# EAGLE board PeakEtherGateway-nosd-v0.1 (EAGLE 6.6.0), part 1 of 2
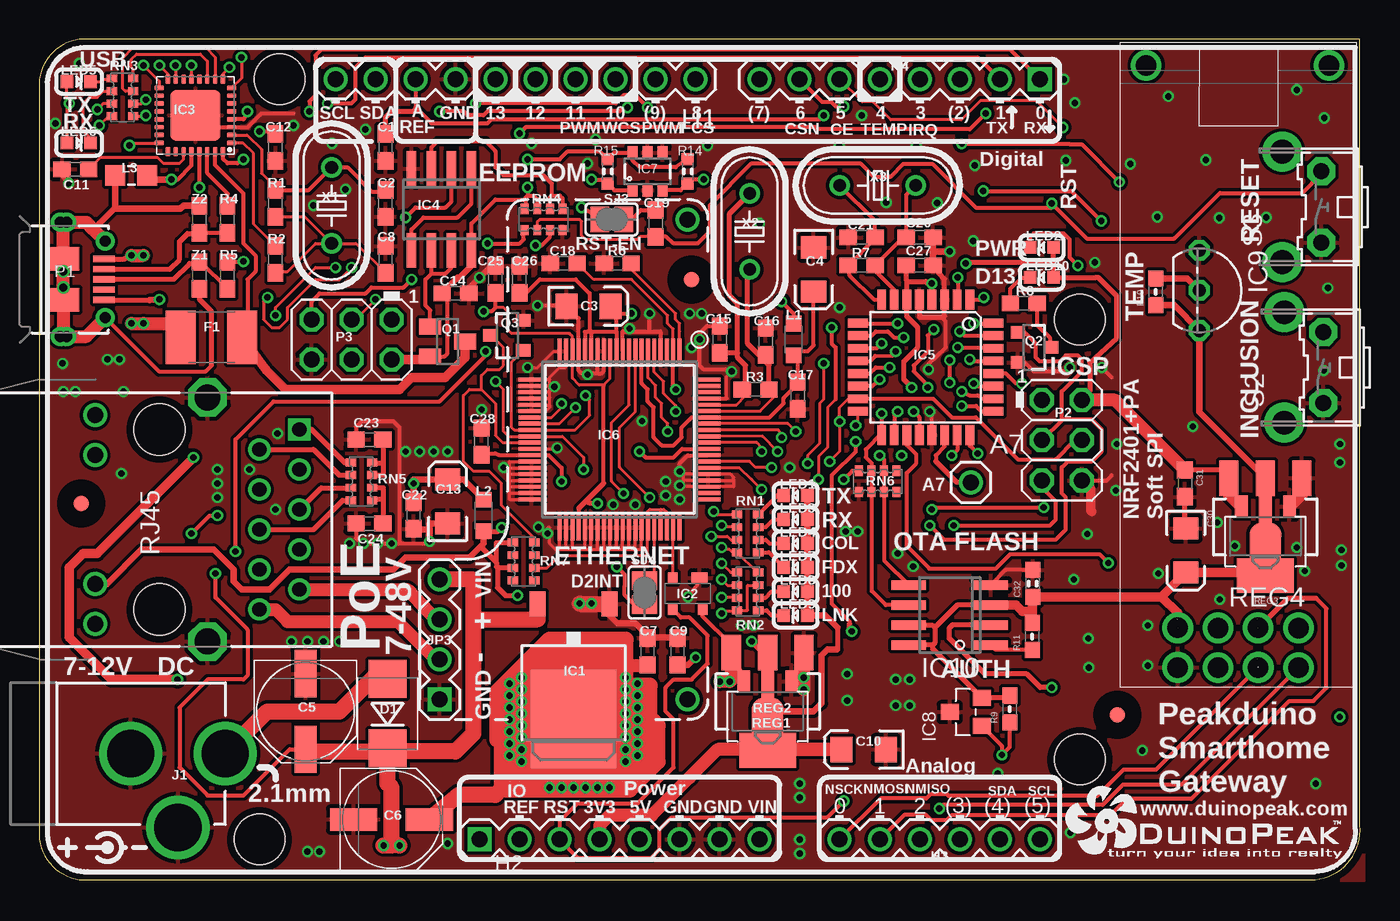
[diagram p0: board, top side]
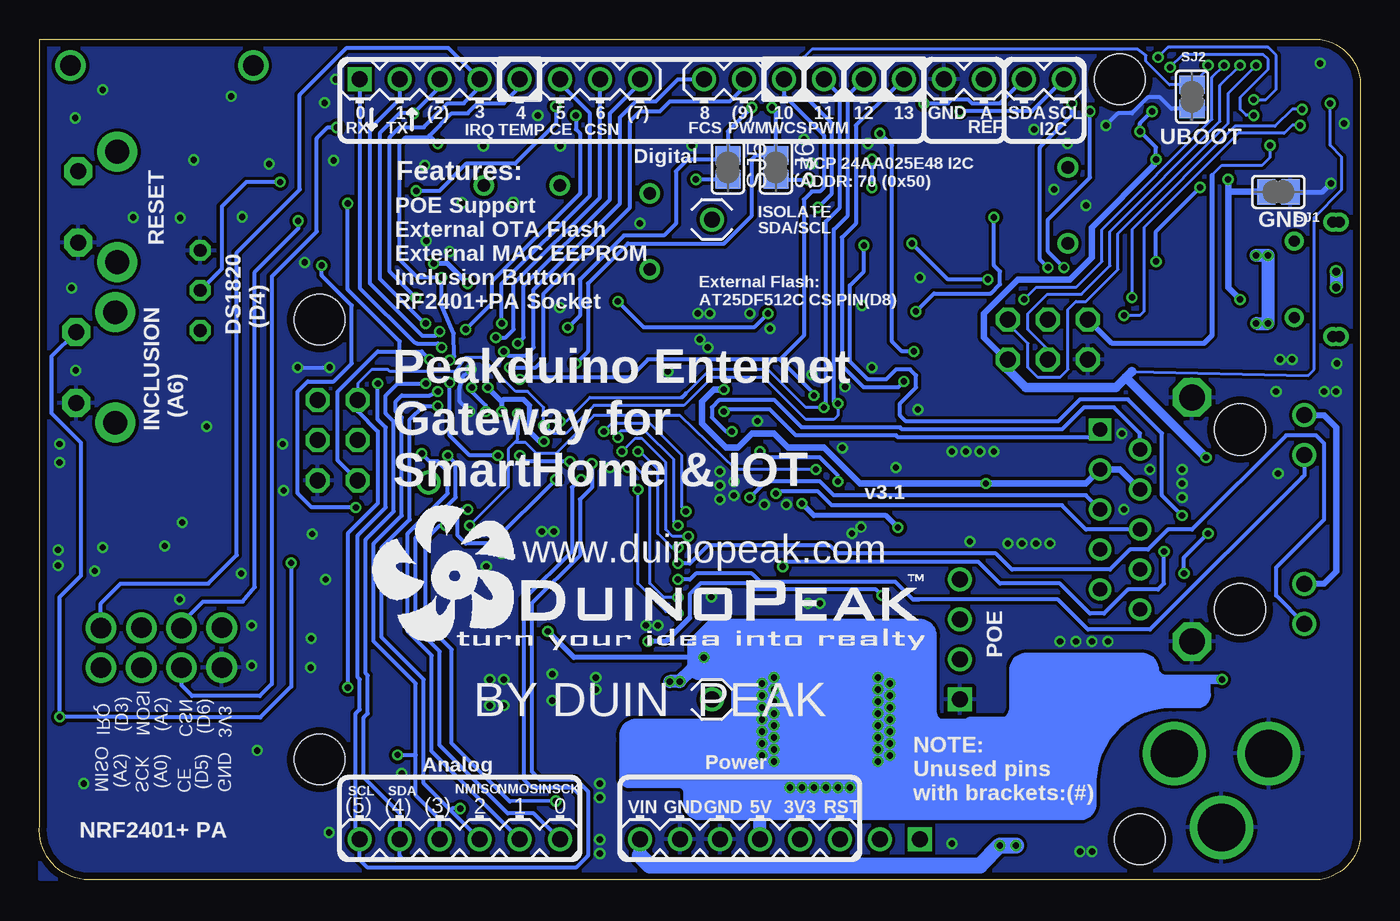
[diagram p1: board, bottom side, seen from below]

Size 83.83 x 53.34 mm. Coordinates in mm from the lower left corner, seen from the top.
Outline: 0,2.54 arc74 2.54,0 80.99,0 arc90 83.82,3.43 83.82,53.34 2.54,53.34 arc74 0,50.8 0,2.54
Copper layers (1*16): Top 0.035mm / dielectric 1.5mm / Bottom 0.035mm
Design rules "default": minimum track width 8mil, minimum drill 15mil, track to track 8mil, track to pad 8mil, pad to pad 8mil, via to via 8mil, smd to smd 8mil, copper to edge 18mil, drill to drill 8mil, minimum pad ring 10mil, minimum via ring 6mil, stop-mask expansion 4mil, vias tented up to drill 25mil, thermal gap 10mil
Net classes: 2 gnd: width 0.203 mm, drill 0.381 mm, clearance 0.178 mm
Holes 3.2 mm at 66.04,35.56 66.04,7.62 13.97,2.54 15.24,50.8
tRestrict: area 40.4,37.1 to 42.4,39.1; area 67.4,9.4 to 69.4,11.5; area 1.7,22.9 to 3.7,24.9

## Footprints (pad centres in the part's own frame; a part is rotated, then mirrored left to right if it is on the bottom)
1X01 = drill 1.016: 1 0,0
0603 = smd 1.1 x 1: 1 -0.85,0; 2 0.85,0
EIA3216 = smd 1.4 x 1.6: A 1.4,0; C -1.4,0
PANASONIC_D = smd 3 x 1.4: + 2.4,0; - -2.4,0
0603-CAP = smd 1.016 x 0.965: 1 -0.85,0; 2 0.85,0
SMB-DIODE = smd 2.4 x 2.4: A 2.2,0; C -2.2,0
L1812 = smd 1.9 x 3.4: 1 -1.95,0; 2 1.95,0
FIDUCIAL-1X2.5 = smd 1 x 1: 1 0,0
1X10 = drill 1.016: 1 0,0; 2 2.54,0; 3 5.08,0; 4 7.62,0; 5 10.16,0; 6 12.7,0; 7 15.24,0; 8 17.78,0; 9 20.32,0; 10 22.86,0
1X08 = drill 1.016 square: 1 0,0 | drill 1.016: 2 2.54,0; 3 5.08,0; 4 7.62,0; 5 10.16,0; 6 12.7,0; 7 15.24,0; 8 17.78,0
1X06 = drill 1.016: 1 0,0; 2 2.54,0; 3 5.08,0; 4 7.62,0; 5 10.16,0; 6 12.7,0
DPACK = smd 1 x 1.6: 1 -2.28,-4.8; 3 2.28,-4.8 | smd 5.4 x 6.2: 2 0,2.5
SOT143-R = smd 1 x 0.7: 1 -0.75,-1 | smd 0.6 x 0.7: 2 0.95,-1; 3 0.95,1; 4 -0.95,1
ATMEL_QFN32 = smd 0.6 x 0.3: 1 -2.3,1.75; 2 -2.3,1.25; 3 -2.3,0.75; 4 -2.3,0.25; 5 -2.3,-0.25; 6 -2.3,-0.75; 7 -2.3,-1.25; 8 -2.3,-1.75; 17 2.3,-1.75; 18 2.3,-1.25; 19 2.3,-0.75; 20 2.3,-0.25; 21 2.3,0.25; 22 2.3,0.75; 23 2.3,1.25; 24 2.3,1.75 | smd 0.3 x 0.6: 9 -1.75,-2.3; 10 -1.25,-2.3; 11 -0.75,-2.3; 12 -0.25,-2.3; 13 0.25,-2.3; 14 0.75,-2.3; 15 1.25,-2.3; 16 1.75,-2.3; 25 1.75,2.3; 26 1.25,2.3; 27 0.75,2.3; 28 0.25,2.3; 29 -0.25,2.3; 30 -0.75,2.3; 31 -1.25,2.3; 32 -1.75,2.3 | smd 3.2 x 3.2: EXP 0,0
SO08 = smd 0.6 x 2.2: 1 -1.905,-2.6; 2 -0.635,-2.6; 3 0.635,-2.6; 4 1.905,-2.6; 5 1.905,2.6; 6 0.635,2.6; 7 -0.635,2.6; 8 -1.905,2.6
TQFP32-08 = smd 1.27 x 0.559: 1 -4.293,2.8; 2 -4.293,2; 3 -4.293,1.2; 4 -4.293,0.4; 5 -4.293,-0.4; 6 -4.293,-1.2; 7 -4.293,-2; 8 -4.293,-2.8; 17 4.293,-2.8; 18 4.293,-2; 19 4.293,-1.2; 20 4.293,-0.4; 21 4.293,0.4; 22 4.293,1.2; 23 4.293,2; 24 4.293,2.8 | smd 0.559 x 1.27: 9 -2.8,-4.293; 10 -2,-4.293; 11 -1.2,-4.293; 12 -0.4,-4.293; 13 0.4,-4.293; 14 1.2,-4.293; 15 2,-4.293; 16 2.8,-4.293; 25 2.8,4.293; 26 2,4.293; 27 1.2,4.293; 28 0.4,4.293; 29 -0.4,4.293; 30 -1.2,4.293; 31 -2,4.293; 32 -2.8,4.293
SQFP80 = smd 1.6 x 0.25: 1 -5.6,3.8; 2 -5.6,3.4; 3 -5.6,3; 4 -5.6,2.6; 5 -5.6,2.2; 6 -5.6,1.8; 7 -5.6,1.4; 8 -5.6,1; 9 -5.6,0.6; 10 -5.6,0.2; 11 -5.6,-0.2; 12 -5.6,-0.6; 13 -5.6,-1; 14 -5.6,-1.4; 15 -5.6,-1.8; 16 -5.6,-2.2; 17 -5.6,-2.6; 18 -5.6,-3; 19 -5.6,-3.4; 20 -5.6,-3.8; 41 5.6,-3.8; 42 5.6,-3.4; 43 5.6,-3; 44 5.6,-2.6; 45 5.6,-2.2; 46 5.6,-1.8; 47 5.6,-1.4; 48 5.6,-1; 49 5.6,-0.6; 50 5.6,-0.2; 51 5.6,0.2; 52 5.6,0.6; 53 5.6,1; 54 5.6,1.4; 55 5.6,1.8; 56 5.6,2.2; 57 5.6,2.6; 58 5.6,3; 59 5.6,3.4; 60 5.6,3.8 | smd 0.25 x 1.6: 21 -3.8,-5.6; 22 -3.4,-5.6; 23 -3,-5.6; 24 -2.6,-5.6; 25 -2.2,-5.6; 26 -1.8,-5.6; 27 -1.4,-5.6; 28 -1,-5.6; 29 -0.6,-5.6; 30 -0.2,-5.6; 31 0.2,-5.6; 32 0.6,-5.6; 33 1,-5.6; 34 1.4,-5.6; 35 1.8,-5.6; 36 2.2,-5.6; 37 2.6,-5.6; 38 3,-5.6; 39 3.4,-5.6; 40 3.8,-5.6; 61 3.8,5.6; 62 3.4,5.6; 63 3,5.6; 64 2.6,5.6; 65 2.2,5.6; 66 1.8,5.6; 67 1.4,5.6; 68 1,5.6; 69 0.6,5.6; 70 0.2,5.6; 71 -0.2,5.6; 72 -0.6,5.6; 73 -1,5.6; 74 -1.4,5.6; 75 -1.8,5.6; 76 -2.2,5.6; 77 -2.6,5.6; 78 -3,5.6; 79 -3.4,5.6; 80 -3.8,5.6
SOT23-6 = smd 0.65 x 0.8: 1 -0.95,-1.2; 2 0,-1.2; 3 0.95,-1.2; 4 0.95,1.2; 5 0,1.2; 6 -0.95,1.2
SOT23 = smd 1.016 x 1.143: 1 -0.889,-1.016; 2 0.889,-1.016; 3 0,1.016
TO92- = drill 0.813 octagon: 1 -2.54,0; 2 0,0; 3 2.54,0
SO-08 = smd 0.6 x 2.2: 1 -1.905,-2.6; 2 -0.635,-2.6; 3 0.635,-2.6; 4 1.905,-2.6; 5 1.905,2.6; 6 0.635,2.6; 7 -0.635,2.6; 8 -1.905,2.6
POWER_JACK_PTH = drill 2.997: GND 0,7.7; GNDBREAK 4.7,10.7; PWR 0,13.7
FT-POE-MODULE-NOLABEL = drill 1.016 square: 1 0,0 | drill 1.016: 2 2.54,0; 3 5.08,0; 4 7.62,0; MNT1 0,-15.748; MNT2 30.48,-15.748
L2012C = smd 1 x 1: 1 -1,0; 2 1,0
0805-LARGE = smd 1.27 x 1.27: 1 -1.016,0; 2 1.016,0
LED-0603 = smd 0.8 x 0.8: A 0,-0.75; C 0,0.75
USB-MICROB-MB05PMXX = smd 0.4 x 1.35: D+ 0,2.575; D- -0.65,2.575; GND 1.3,2.575; ID 0.65,2.575; VBUS -1.3,2.575 | smd 1.5 x 2: FIX1 -1.3,0; FIX2 1.3,0 | drill 0.7: PIN1 -2.425,2.65; PIN2 2.425,2.65; SLOT1 -3.625,-0.2; SLOT2 3.625,-0.2; TAB1 -3.625,0.2; TAB2 3.625,0.2
2X03 = drill 1.016 octagon: 1 -2.54,-1.27; 2 -2.54,1.27; 3 0,-1.27; 4 0,1.27; 5 2.54,-1.27; 6 2.54,1.27
SOT23' = smd 1 x 1.4: 1 -0.95,-1.1; 2 0.95,-1.1; 3 0,1.1
SOT23-3 = smd 0.8 x 0.9: 1 -0.95,-1; 2 0.95,-1; 3 0,1.1
0603-RES = smd 1.016 x 0.965: 1 -0.85,0; 2 0.85,0
0603' = smd 0.762 x 0.762: 1 -0.762,0; 2 0.762,0
SOT89 = smd 0.8 x 1.4: 1 -1.524,-1.905; 3 1.524,-1.905 | smd 0.8 x 1.9: 2 0,-1.651 | smd 2.032 x 3.65: 4 0,0.94
SOT223 = smd 1.219 x 2.235: 1 -2.311,-3.099; 2 0,-3.099; 3 2.311,-3.099 | smd 3.6 x 2.2: 4 0,3.099
CAY16 = smd 0.5 x 0.65: 1 -1.2,-0.675; 2 -0.4,-0.675; 3 0.4,-0.675; 4 1.2,-0.675; 5 1.2,0.675; 6 0.4,0.675; 7 -0.4,0.675; 8 -1.2,0.675
B3F-31XX = drill 1.016 pad 1.778 octagon: 1 -2.261,-1.245; 2 2.261,-1.245 | drill 1.499 pad 2.54: 3 -3.505,1.245; 4 3.505,1.245
SJ = smd 1.168 x 1.6: 1 -0.762,0; 2 0.762,0
SJC = smd 1.168 x 1.6: 1 -0.762,0; 2 0.762,0
HY931147C = drill 1.63 octagon: GND1 3.05,7.745; GND2 3.05,-7.745 | drill 0.9 square: P$1 8.89,5.715 | drill 0.9: P$2 6.35,4.445; P$3 8.89,3.175; P$4 6.35,1.905; P$5 8.89,0.635; P$6 6.35,-0.635; P$7 8.89,-1.905; P$8 6.35,-3.175; P$9 8.89,-4.445; P$10 6.35,-5.715 | drill 1.016: P$11 -4.08,6.625; P$12 -4.08,4.085; P$13 -4.08,-4.085; P$14 -4.08,-6.625 | hole 3.25: 0,5.715; 0,-5.715
NRF2401_PA_OUTLINE = drill 1.3: 3V3 3.677,3.785; CE 6.236,1.264; CSN 6.229,3.778; GND 3.683,1.27; GND1 1.676,39.491; GND2 13.278,39.484; IRQ 11.347,3.778; MISO 11.354,1.264; MOSI 8.782,3.785; SCK 8.788,1.27
HC49U-V = drill 0.813: 1 -2.413,0; 2 2.413,0

## Placement (x,y rotation side)
A7  M01PTH  [1X01]  59.12,25.21 0 top
C1  100nF 0603  [0603]  21.97,46.48 270 top
C2  22pF 0603  [0603]  21.97,42.93 90 top
C3  10uF 6.3V A TANT  [EIA3216]  34.85,36.4 0 top
C4  10uF 6.3V A TANT  [EIA3216]  49.15,38.73 270 top
C5  47uF 25V  [PANASONIC_D]  16.89,10.67 270 top
C6  47uF 25V  [PANASONIC_D]  22.35,3.81 0 top
C7  100nF 0603  [0603]  38.61,14.48 90 top
C8  22pF 0603  [0603]  21.97,39.37 270 top
C9  1uF 0603  [0603]  40.51,14.48 90 top
C10  10uF 6.3V A TANT  [EIA3216]  52.32,8.26 180 top
C11  1uF 0603  [0603]  2.29,45.09 180 top
C12  100nF 0603  [0603]  14.99,46.48 270 top
C13  10uF 6.3V A TANT  [EIA3216]  25.91,24 90 top
C14  100nF 0603  [0603]  26.42,37.21 0 top
C15  13pF  [0603]  43.18,34.29 90 top
C16  13pF  [0603]  46.1,34.16 90 top
C17  100nF  [0603]  48.13,30.73 270 top
C18  10nF  [0603]  33.27,39.12 180 top
C19  100nF 0603  [0603]  39.12,41.66 270 top
C20  22pF 0603  [0603]  55.88,40.77 180 top
C21  22pF 0603  [0603]  52.2,40.77 0 top
C22  100nF  [0603]  23.75,23.11 270 top
C23  100nF  [0603]  20.95,27.94 180 top
C24  100nF  [0603]  20.95,22.61 180 top
C25  100nF  [0603]  28.96,38.1 90 top
C26  100nF  [0603]  30.48,38.1 90 top
C27  100nF 0603  [0603]  55.88,38.99 0 top
C28  100nF  [0603]  28.07,27.81 90 top
C30  10uF 6.3V A TANT  [EIA3216]  72.77,20.89 270 top
C31  1uF 0603  [0603]  72.71,25.15 270 top
C32  0.1u  [0603-CAP]  63.06,18.8 90 top
D1  1N4004 SMB  [SMB-DIODE]  22.1,10.54 90 top
F1  500mA PTC 1812  [L1812]  10.92,34.42 0 top
FID1  FIDUCIAL1X2.5  [FIDUCIAL-1X2.5]  41.4,38.1 0 top
FID2  FIDUCIAL1X2.5  [FIDUCIAL-1X2.5]  68.42,10.45 0 top
FID3  FIDUCIAL1X2.5  [FIDUCIAL-1X2.5]  2.67,23.88 0 top
H1  Digital_8_13  [1X10]  41.66,50.8 180 top
H2  Power  [1X08]  27.94,2.54 0 top
H3  Analog  [1X06]  50.8,2.54 0 top
H4  Digital_0_7  [1X08]  63.5,50.8 180 top
IC1  MC33269DT-5.0  [DPACK]  33.91,12.7 180 top
IC2  APX811-44UG-7  [SOT143-R]  41.15,18.16 180 top
IC3  ATMEGA16U2-MU  [ATMEL_QFN32]  9.91,48.51 180 top
IC4  LM358D  [SO08]  25.53,42.55 180 top
IC5  ATMEGA328P TQFP32  [TQFP32-08]  56.26,32.53 270 top
IC6  W5100SQFP80  [SQFP80]  36.83,27.94 270 top
IC7  MCP24AA025E48  [SOT23-6]  38.61,44.96 0 top
IC8  ATSHA204A  [SOT23]  58.8,10.64 90 top
IC9  DS1820  [TO92-]  73.63,37.4 270 top
IC10  AT25DF512C-SSHN-B  [SO-08]  57.78,16.8 90 top
J1  DC_2_1MM  [POWER_JACK_PTH]  -1.91,8 270 top
JP3  FT-POE-MODULE3  [FT-POE-MODULE-NOLABEL]  25.4,11.43 90 top
L1  1uH 250mA 0805  [L2012C]  47.88,34.29 270 top
L2  1uH 250mA 0805  [L2012C]  28.19,23.11 90 top
L3  0805 INDUCTOR  [0805-LARGE]  5.84,44.7 0 top
LED1  YELLOW  [LED-0603]  48.01,24.38 90 top
LED2  PWR/BLUE  [LED-0603]  63.63,40.13 90 top
LED3  YELLOW  [LED-0603]  48.01,22.86 90 top
LED4  RED  [LED-0603]  48.01,21.34 90 top
LED5  TX/YEL  [LED-0603]  2.5,50.65 270 top
LED6  RX/GRN  [LED-0603]  2.5,46.76 270 top
LED7  GREEN  [LED-0603]  48.01,19.81 90 top
LED8  GREEN  [LED-0603]  48.01,18.29 90 top
LED9  YELLOW  [LED-0603]  48.01,16.76 90 top
LED10  D13/RED  [LED-0603]  63.63,38.23 90 top
P1  USB-6PSMT  [USB-MICROB-MB05PMXX]  1.52,38.1 270 top
P2  ICSP:MAIN  [2X03]  64.91,27.89 270 top
P3  ICSP:USB  [2X03]  19.81,34.29 180 top
Q1  FDN340P  [SOT23']  25.91,34.16 270 top
Q2  2N7002  [SOT23-3]  63.12,33.78 270 top
Q3  2N7002  [SOT23-3]  29.72,34.54 90 top
R1  1M 0603  [0603]  14.99,42.93 90 top
R2  27R 0603  [0603]  14.99,39.37 270 top
R3  1M  [0603]  45.47,31.11 0 top
R4  22R 0603  [0603]  11.94,41.91 270 top
R5  22R 0603  [0603]  11.94,38.35 270 top
R6  12K3 1%  [0603]  36.7,39.12 0 top
R7  1M 0603  [0603]  52.2,38.99 0 top
R8  1K 0603  [0603]  62.48,36.58 180 top
R9  56k  [0603-RES]  61.59,10.83 90 top
R10  10k  [0603-RES]  70.87,37.31 90 top
R11  [0603-RES]  63.02,15.43 90 top
R14  4K7  [0603']  41.15,44.96 270 top
R15  4K7  [0603']  36.07,44.96 270 top
REG1  LD1117-SOT89  [SOT89]  46.23,10.67 180 top
REG2  LD1117-SOT223  [SOT223]  46.23,11.3 180 top
REG3  LD1117-SOT223  [SOT223]  77.82,22.38 180 top
REG4  LD1117-SOT89  [SOT89]  77.82,21.78 180 top
RN1  1K  [CAY16]  44.96,21.97 270 top
RN2  1K  [CAY16]  44.96,18.29 270 top
RN3  1K  [CAY16]  5.28,49.66 270 top
RN4  10K  [CAY16]  32,41.91 0 top
RN5  49R9 1%  [CAY16]  20.45,25.27 270 top
RN6  1K  [CAY16]  53.21,25.27 0 top
RN7  1K  [CAY16]  30.73,20.19 90 top
S2  [B3F-31XX]  80.26,32.51 90 top
S3  [B3F-31XX]  80.14,42.7 90 top
SJ1  GROUND  [SJ]  5.19,43.66 0 bottom
SJ2  UBOOT  [SJ]  10.67,49.7 90 bottom
SJ3  RESET-EN  [SJ]  36.32,41.91 0 top
SJ4  D2_INT  [SJ]  38.42,18.22 90 top
SJ5  [SJC]  40.13,45.21 270 bottom
SJ6  [SJC]  37.08,45.21 270 bottom
U1  HY931147C-RJ45  [HY931147C]  7.62,22.86 0 top
U$8  [DUINOPEAK-LOGO-1.2]  62.8,14.57 0 bottom
U$17  NRF2401  [NRF2401_PA_OUTLINE]  68.58,12.19 0 top
U$20  [DUINOPEAK-LOGO-0.6]  65.09,1.33 0 top
X1  16MHz  [HC49U-V]  18.54,42.8 90 top
X2  25MHz  [HC49U-V]  45.09,41.15 270 top
X3  16MHz  [HC49U-V]  53.21,44.07 0 top
Z1  PGB1010603  [0603]  10.16,38.35 270 top
Z2  PGB1010603  [0603]  10.16,41.91 90 top

## Library data of the parts
A7 IC5 = freetronics-2
C1-C4 C7-C28 C30 C31 D1 FID1-FID3 H3 H4 J1 LED1-LED10 Q2 Q3 R1-R8 REG1-REG4 Z1 Z2 = freetronics
C5 C6 F1 L1 L2 = rcl
C32 R9-R11 = LowPowerLab
H1 = freetronics-original
H2 IC2 L3 Q1 RN1-RN7 X1-X3 = freetronics-master-v1
IC1 IC4 = linear
IC3 IC7 P1 SJ5 SJ6 U1 = freetronics-jon
IC6 = freetronics-marc
IC8 IC9 = rollershutter
IC10 = microchip; MF: MICROCHIP; MPN: 25AA080/SN; OC_FARNELL: 1816072; OC_NEWARK: 92C7351
JP3 R14 R15 = freetronics-master-v1.1
P2 P3 = pinhead
S2 S3 = adafruit
SJ1-SJ4 = jumper
U$8 U$17 U$20 = duinopeak-logo

## Nets
1V8_OUT: C3.A C26.1 IC6.11 IC6.15 IC6.16 L1.1
1V8A: C4.A C17.1 IC6.7 IC6.74 L1.2
1V8OUT: C28.1 IC6.33 IC6.69
3V3_NRF24: C30.A C32.1 IC8.2 IC9.3 IC10.3 IC10.7 IC10.8 R9.2 R10.1 R11.2 REG3.2 REG3.4 REG4.2 REG4.4 U$17.3V3
3V3A: C13.A C18.1 C22.1 IC6.2 L2.2 U1.P$3 U1.P$4
3V3D: C10.A C25.1 H2.4 IC4.2 IC6.12 IC6.18 IC6.44 L2.1 LED1.A LED3.A LED4.A LED7.A LED8.A LED9.A REG1.2 REG1.4 REG2.2 REG2.4 RN7.5 RN7.7 U1.P$11 U1.P$13
5V [power]: C6.+ C7.1 C9.1 C12.1 C14.1 C27.1 C31.1 H2.5 IC1.2 IC2.4 IC3.4 IC3.32 IC4.8 IC5.4 IC5.6 IC5.18 IC7.6 LED2.A LED5.A LED6.A LED10.A P2.2 P3.2 Q1.2 R14.1 R15.1 REG1.3 REG2.3 REG3.3 REG4.3 RN4.7 RN4.8
A0_SCK: H3.1 IC5.23 U$17.SCK
A1_MOSI: H3.2 IC5.24 U$17.MOSI
A2_MISO: H3.3 IC5.25 U$17.MISO
A3: H3.4 IC5.26 IC8.1 R9.1
A4_SDA: H1.9 H3.5 IC5.27 SJ5.1
A5_SCL: H1.10 H3.6 IC5.28 SJ6.1
A6_INCLUSION: IC5.19 S2.2
A7: A7.1 IC5.22
AREF: C1.1 H1.8 IC5.20
COLLED: IC6.71 RN1.3
D0_RX: H4.1 IC5.30 RN3.4
D1_TX: H4.2 IC5.31 RN3.3
D2: H4.3 IC5.32 SJ4.1
D3_IRQ: H4.4 IC5.1 U$17.IRQ
D4_DS1820: H4.5 IC5.2 IC9.2 R10.2
D5_CE: H4.6 IC5.9 U$17.CE
D6_CSN: H4.7 IC5.10 U$17.CSN
D7: H4.8 IC5.11
D8: H1.1 IC5.12
D8_FLASH_CSN: IC10.1 R11.1
D9: H1.2 IC5.13
D10_SS: H1.3 IC5.14 IC6.29 Q3.1
D11_MOSI: H1.4 IC5.15 IC6.28 IC10.5 P2.4
D12_MISO: H1.5 IC5.16 IC6.27 IC10.2 P2.1
D13_SCK: H1.6 IC5.17 IC6.30 IC10.6 P2.3 Q2.1
DTR: IC3.13 SJ2.2 SJ3.1
FDXLED: IC6.70 RN1.4 RN2.8
GND: C1.2 C2.1 C3.C C4.C C5.- C6.- C7.2 C8.1 C9.2 C10.C C11.2 C12.2 C13.C C14.2 C15.2 C16.2 C17.2 C18.2 C20.1 C21.1 C22.2 C23.2 C24.2 C25.2 C26.2 C27.2 C28.2 C30.C C31.2 C32.2 H1.7 H2.6 H2.7 IC1.1 IC2.1 IC3.3 IC3.EXP IC4.4 IC5.3 IC5.5 IC5.21 IC6.4 IC6.10 IC6.13 IC6.14 IC6.17 IC6.19 IC6.20 IC6.21 IC6.22 IC6.23 IC6.24 IC6.25 IC6.26 IC6.32 IC6.34 IC6.35 IC6.36 IC6.37 IC6.38 IC6.39 IC6.40 IC6.41 IC6.42 IC6.43 IC6.45 IC6.46 IC6.47 IC6.48 IC6.49 IC6.50 IC6.51 IC6.52 IC6.53 IC6.54 IC6.63 IC6.64 IC6.65 IC6.68 IC6.77 IC7.2 IC7.4 IC7.5 IC8.3 IC9.1 IC10.4 J1.GND J1.GNDBREAK JP3.1 P2.6 P3.6 Q2.2 Q3.2 R6.1 REG1.1 REG2.1 REG3.1 REG4.1 RN4.4 RN6.1 S2.1 S3.1 SJ1.2 SJ2.1 U1.GND1 U1.GND2 U$17.GND
INT: IC6.56 SJ4.2
LINKLED: IC6.66 RN2.4 RN2.7
MISO2: IC3.17 P3.1
MOSI2: IC3.16 P3.4
N$1: C24.1 RN5.5 RN5.6
N$2: C20.2 IC5.7 R7.2 X3.2
N$3: C19.1 SJ3.2
N$4: LED10.C R8.2
N$5: IC7.1 R15.2 SJ6.2
N$6: Q2.3 R8.1
N$7: C21.2 IC5.8 R7.1 X3.1
N$8: IC3.1 R2.1
N$9: L3.1 P1.FIX1 P1.FIX2 P1.PIN1 P1.PIN2 P1.TAB1 P1.TAB2 Z1.2 Z2.2
N$11: LED6.C RN3.2
N$12: IC4.3 RN4.5 RN4.6
N$13: LED5.C RN3.1
N$14: LED2.C RN6.8
N$16: P1.D+ R5.2 Z1.1
N$17: P1.D- R4.2 Z2.1
N$18: IC4.6 IC4.7 Q1.1
N$19: IC4.1 IC4.5
N$26: LED8.C RN2.6
N$27: IC6.55 IC6.57 IC6.58 RN7.2
N$28: LED9.C RN2.5
N$29: IC7.3 R14.2 SJ5.2
N$60: D1.A J1.PWR
N$67: RN2.1 U1.P$14
N$68: JP3.3 U1.P$9
N$69: JP3.2 U1.P$10
N$113: C2.2 IC3.2 R1.2 X1.2
N$114: C8.2 R1.1 R2.2 X1.1
N$115: F1.1 P1.VBUS
N$117: C11.1 IC3.27
N$321: C23.1 RN5.7 RN5.8
N$322: IC6.1 R6.2
N$327: LED7.C RN1.5
N$328: LED4.C RN1.6
N$329: LED3.C RN1.7
N$330: LED1.C RN1.8
N$332: RN2.2 U1.P$12
RD+: IC3.29 R5.1
RD-: IC3.30 R4.1
RESET: C19.2 H2.3 IC2.3 IC5.29 P2.5 RN4.2 S3.2
RESET2: IC3.24 P3.5 RN4.1
RXIN: IC6.6 RN5.2 U1.P$2
RXIP: IC6.5 RN5.1 U1.P$1
RXLED: IC3.10 RN3.7
SCK2: IC3.15 P3.3
SEN: IC6.31 Q3.3 RN7.4
SPDLED: IC6.67 RN2.3
TXLED: IC3.11 RN3.8
TXON: IC6.9 RN5.4 U1.P$6
TXOP: IC6.8 RN5.3 U1.P$5
USBGND: IC3.28 L3.2 P1.GND SJ1.1
USBRXD: IC3.9 RN3.5
USBTXD: IC3.8 RN3.6
USBVCC: F1.2 IC3.31 Q1.3
VIN: C5.+ D1.C H2.8 IC1.3 JP3.4 RN4.3
WIZRST: IC2.2 IC6.59
WRXLED: IC6.72 RN1.2
WTXLED: IC6.73 RN1.1
XTLN: C16.1 IC6.75 R3.2 X2.2
XTLP: C15.1 IC6.76 R3.1 X2.1